# EAGLE board SFX100_LeonardoBreakout (EAGLE 9.3.1)
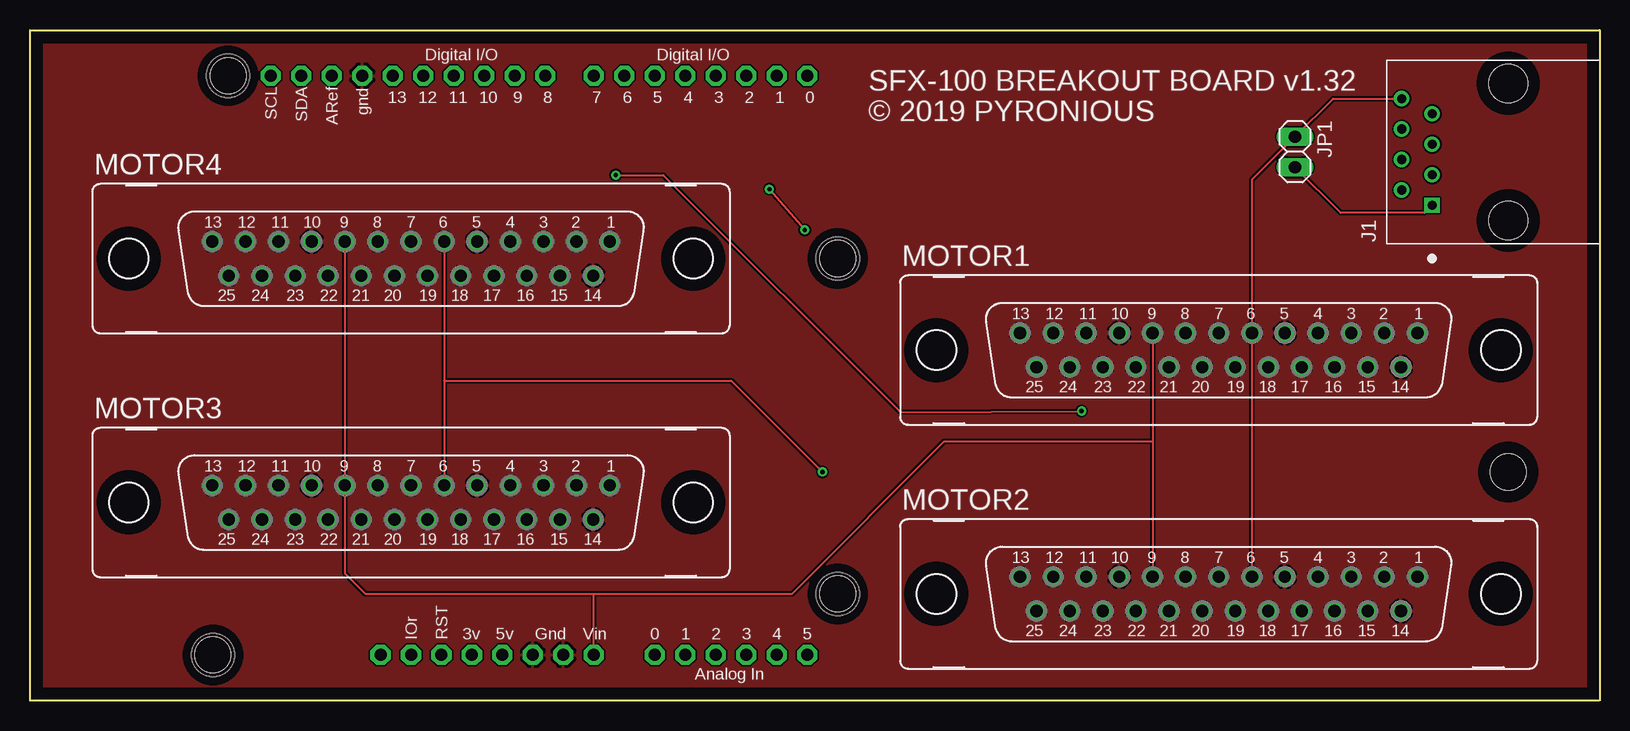
[diagram p0: board, top side]
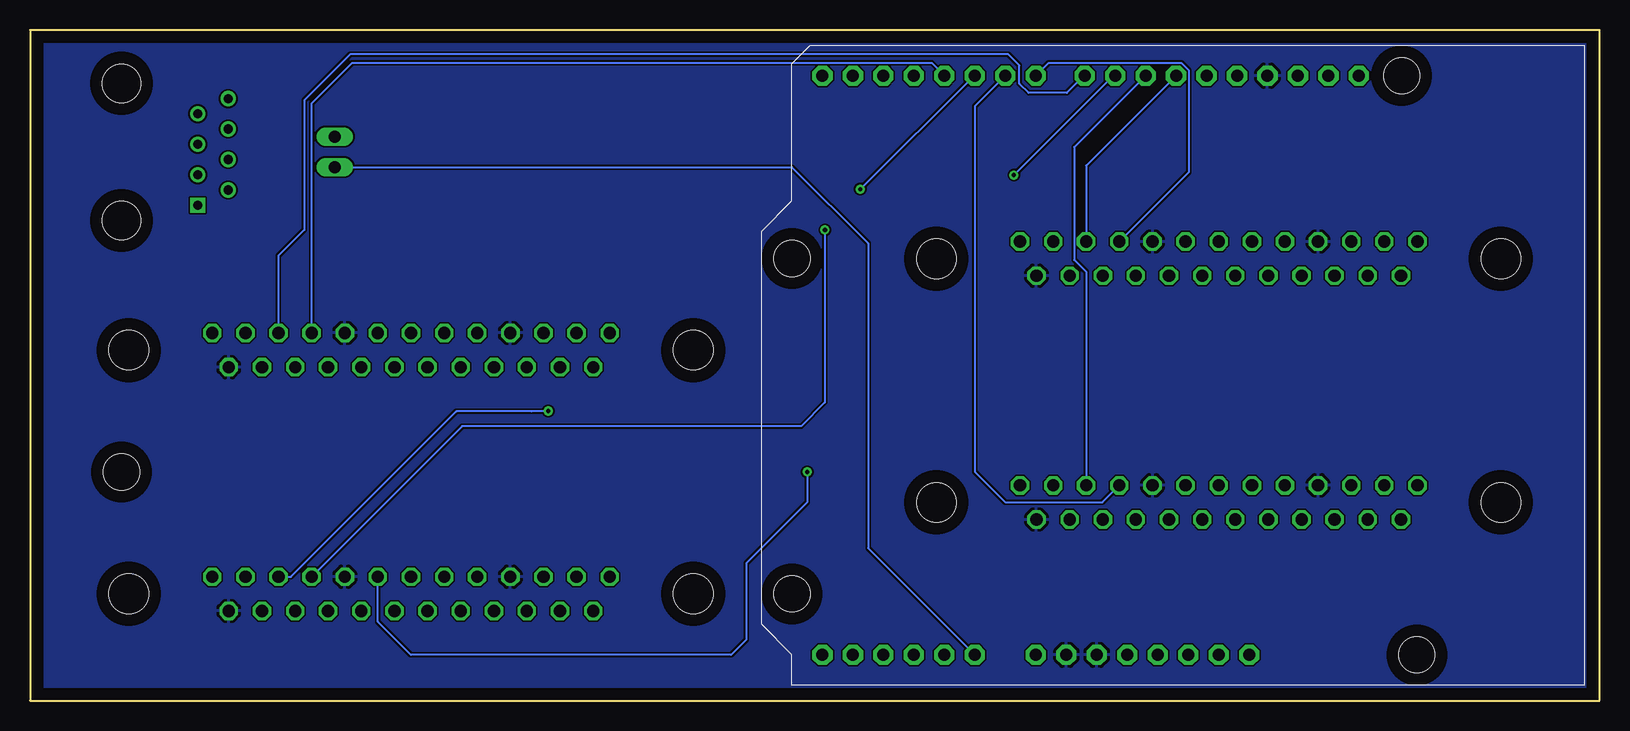
[diagram p1: board, bottom side, seen from below]

Size 130.81 x 55.88 mm. Coordinates in mm from the lower left corner, seen from the top.
Outline: 0,55.88 130.81,55.88 130.81,0 0,0 0,55.88
Copper layers (1*16): Top 0.035mm / dielectric 1.5mm / Bottom 0.035mm
Design rules "default": minimum track width 6mil, minimum drill 0.35mm, track to track 6mil, track to pad 6mil, pad to pad 6mil, via to via 6mil, smd to smd 6mil, copper to edge 40mil, drill to drill 6mil, minimum pad ring 10mil, minimum via ring 8mil, stop-mask expansion 4mil, vias tented up to drill 0mil, thermal gap 10mil
Holes 3 mm at 16.51,52.07 15.24,3.81 67.31,8.89 67.31,36.83 123.19,19.05

## Footprints (pad centres in the part's own frame; a part is rotated, then mirrored left to right if it is on the bottom)
AMPHENOL_54602-908LF = drill 0.76 square: 1 -4.445,6.35 | drill 0.76: 2 -3.175,8.89; 3 -1.905,6.35; 4 -0.635,8.89; 5 0.635,6.35; 6 1.905,8.89; 7 3.175,6.35; 8 4.445,8.89 | hole 3.2: -5.715,0; 5.715,0
1X02 = drill 1.016 long: 1 -1.27,0; 2 1.27,0
F25V = drill 1.016 octagon: 1 16.561,1.422; 2 13.792,1.422; 3 11.049,1.422; 4 8.28,1.422; 5 5.512,1.422; 6 2.769,1.422; 7 0,1.422; 8 -2.769,1.422; 9 -5.512,1.422; 10 -8.28,1.422; 11 -11.049,1.422; 12 -13.792,1.422; 13 -16.561,1.422; 14 15.189,-1.422; 15 12.421,-1.422; 16 9.652,-1.422; 17 6.909,-1.422; 18 4.14,-1.422; 19 1.372,-1.422; 20 -1.372,-1.422; 21 -4.14,-1.422; 22 -6.909,-1.422; 23 -9.652,-1.422; 24 -12.421,-1.422; 25 -15.189,-1.422 | hole 3.302: 23.52,0; -23.52,0
ARDUINOR3-BPLACE = drill 1 pad 1.676 octagon: 3V 35.56,2.54; 5V 38.1,2.54; A0 50.8,2.54; A1 53.34,2.54; A2 55.88,2.54; A3 58.42,2.54; A4 60.96,2.54; A5 63.5,2.54; AREF 23.876,50.8; D0 63.5,50.8; D1 60.96,50.8; D2 58.42,50.8; D3 55.88,50.8; D4 53.34,50.8; D5 50.8,50.8; D6 48.26,50.8; D7 45.72,50.8; D8 41.656,50.8; D9 39.116,50.8; D10 36.576,50.8; D11 34.036,50.8; D12 31.496,50.8; D13 28.956,50.8; GND 26.416,50.8; GND1 43.18,2.54; GND2 40.64,2.54; IOREF 30.48,2.54; RESERVED 27.94,2.54; RESET 33.02,2.54; SCL 18.796,50.8; SDA 21.336,50.8; VIN 45.72,2.54

## Placement (x,y rotation side)
J1  54602-908LF  [AMPHENOL_54602-908LF]  123.19,45.72 90 top
JP1  [1X02]  105.41,45.72 270 top
MOTOR1  [F25V]  99.06,29.21 0 top
MOTOR2  [F25V]  99.06,8.89 0 top
MOTOR3  [F25V]  31.75,16.51 0 top
MOTOR4  [F25V]  31.75,36.83 0 top
U1  ARDUINOR3-BPLACE  [ARDUINOR3-BPLACE]  1.27,1.27 0 top

## Library data of the parts
J1 = 54602-908LF; DESCRIPTION: Cat3 Rj45 Modular Jack, 8 Position, 1 Port; DIGI-KEY_PART_NUMBER: 609-1046-ND; DIGI-KEY_PURCHASE_URL: https://www.digikey.com/product-detail/en/amphenol-icc-fci/54602-908LF/609-1046-ND/1001360?utm_source=snapeda&utm_medium=aggregator&utm_campaign=symbol; MF: Amphenol ICC; MP: 54602-908LF; PACKAGE: None
JP1 = pinhead
MOTOR1-MOTOR4 = con-subd; OC_FARNELL: unknown; OC_NEWARK: unknown
U1 = adafruit

## Nets
3V: U1.3V
5V: U1.5V
DIR1: MOTOR1.4 U1.D4
DIR2: MOTOR2.4 U1.D5
DIR3: MOTOR3.4 U1.D6
DIR4: MOTOR4.4 U1.D7
ENA: J1.1 JP1.2 U1.A0
ESTOP: J1.8 JP1.1 MOTOR1.6 MOTOR2.6 MOTOR3.6 MOTOR4.6
GND: MOTOR1.5 MOTOR1.10 MOTOR1.14 MOTOR2.5 MOTOR2.10 MOTOR2.14 MOTOR3.5 MOTOR3.10 MOTOR3.14 MOTOR4.5 MOTOR4.10 MOTOR4.14 U1.GND U1.GND1 U1.GND2
STEP1: MOTOR1.3 U1.D8
STEP2: MOTOR2.3 U1.D9
STEP3: MOTOR3.3 U1.D10
STEP4: MOTOR4.3 U1.D11
VCC: MOTOR1.9 MOTOR2.9 MOTOR3.9 MOTOR4.9 U1.VIN

## Tracks (layer width: path | path; a pad name or v marks a point on that pad's centre or on a via)
DIR1
  Bottom 0.152: MOTOR1.4 107.34,49.76 103.97,53.14 55.68,53.14 U1.D4
DIR2  (via drill 0.35)
  Top 0.152: v61.62,42.62 v64.57,39.22
  Bottom 0.152: MOTOR2.4 94.79,22.86 66.55,22.86 64.57,24.84 v64.57,39.22 | v61.62,42.62 52.17,52.02 U1.D5
DIR3
  Bottom 0.152: U1.D6 52.07,49.53 52.07,19.05 49.53,16.51 41.45,16.51 MOTOR3.4
DIR4
  Bottom 0.152: U1.D7 45.92,53.14 34.86,53.14 34.24,52.51 34.24,44.04 MOTOR4.4
ENA
  Top 0.152: JP1.2 109.22,40.64 116.2,40.64 J1.1
  Bottom 0.152: JP1.2 67.31,44.45 60.96,38.1 60.96,12.7 U1.A0
ESTOP  (via drill 0.35)
  Top 0.152: MOTOR4.6 34.52,26.67 | 34.52,26.67 MOTOR3.6 | MOTOR2.6 MOTOR1.6 101.83,43.41 JP1.1 108.58,50.17 J1.8 | v66.04,19.05 58.42,26.67 34.52,26.67
  Bottom 0.152: MOTOR2.6 101.83,6.58 99.06,3.81 72.39,3.81 71.12,5.08 71.12,11.43 66.04,16.51 v66.04,19.05
GND
  pour Top: 0,55.88 130.81,55.88 130.81,0 0,0
  pour Bottom: 0,55.88 130.81,55.88 130.81,0 0,0
STEP1
  Bottom 0.152: U1.D8 43.03,52.02 44.4,50.65 47.6,50.65 48.36,51.41 48.36,52.93 49.28,53.85 104.14,53.85 107.95,50.04 107.95,39.22 110.11,37.06 MOTOR1.3
STEP2  (via drill 0.35)
  Top 0.152: v48.82,43.79 52.78,43.79 72.54,24.03 v87.63,24.13
  Bottom 0.152: MOTOR2.3 109.07,10.31 95.27,24.11 89,24.11 v87.63,24.13 | v48.82,43.79 40.44,52.17 U1.D9
STEP3
  Bottom 0.152: U1.D10 43.79,46.13 43.79,36.73 42.8,35.74 MOTOR3.3
STEP4
  Bottom 0.152: U1.D11 42.8,44.58 MOTOR4.3
VCC
  Top 0.152: MOTOR4.9 MOTOR3.9 26.24,10.59 27.94,8.89 46.99,8.89 | MOTOR1.9 93.55,21.59 | 93.55,21.59 MOTOR2.9 | U1.VIN 46.99,8.89 | 46.99,8.89 63.5,8.89 76.2,21.59 93.55,21.59

## Text on the board
tPlace: SFX-100 BREAKOUT BOARD v1.32 | © 2019 PYRONIOUS